# EAGLE board ultrasonic_v3 (EAGLE 9.7.0)
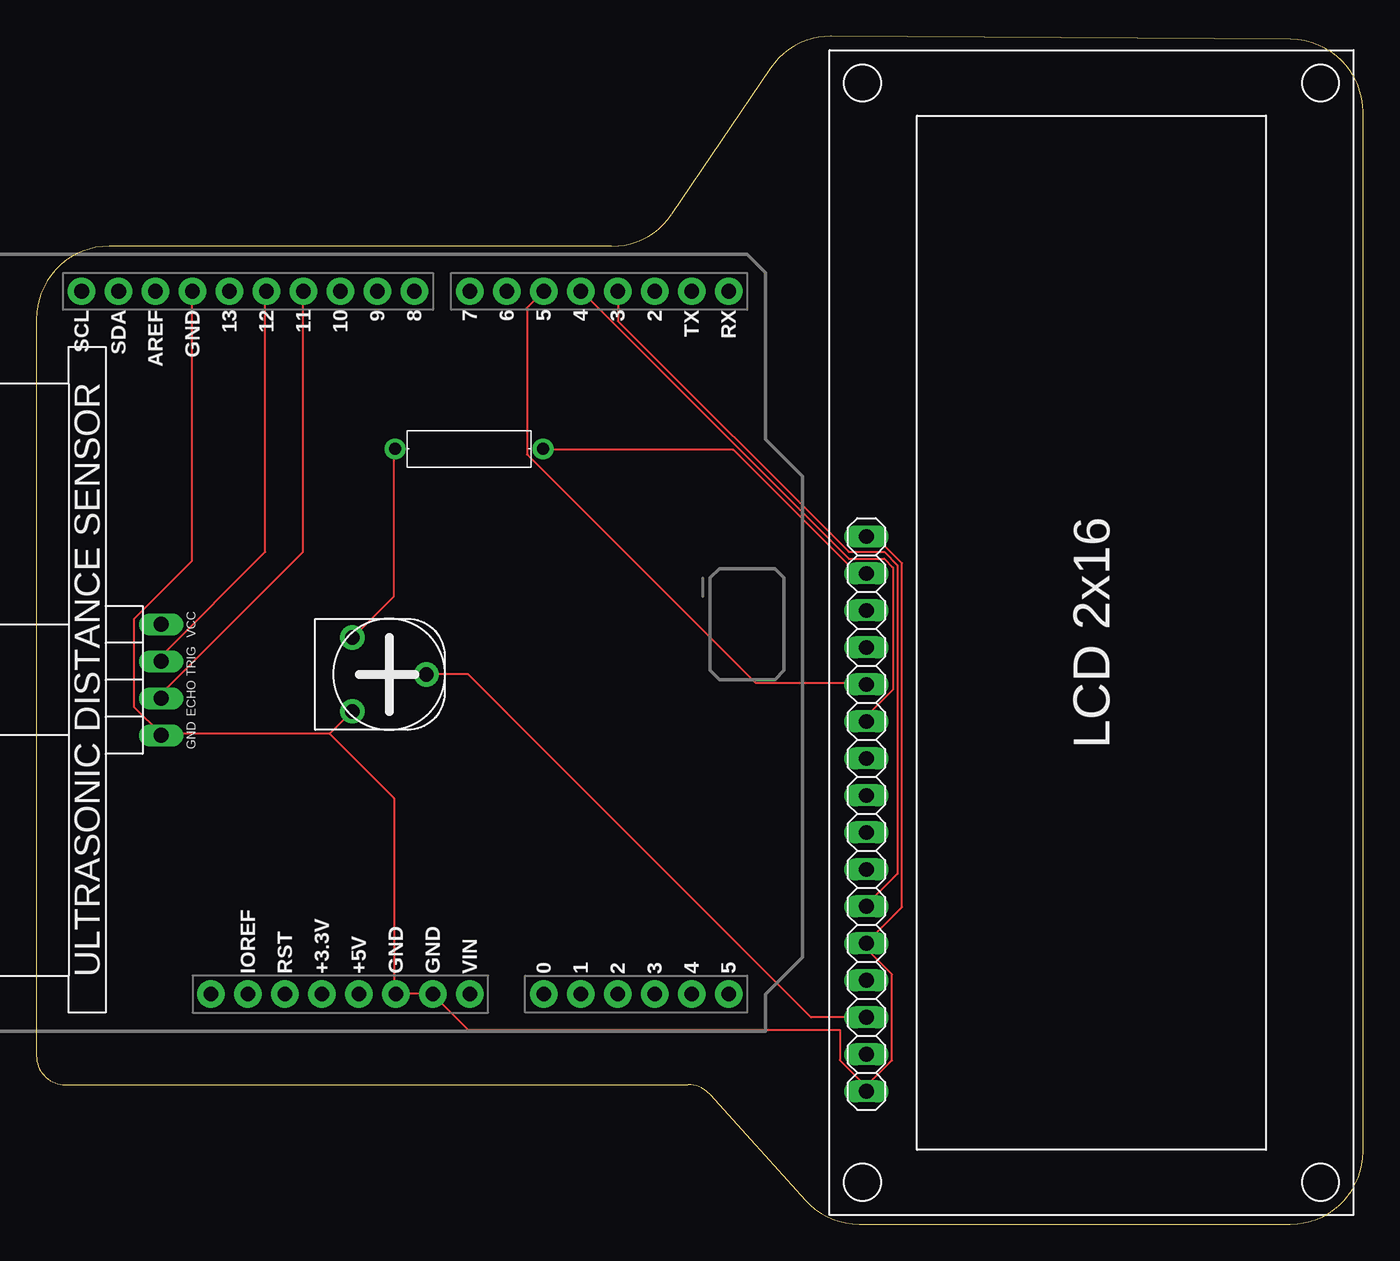
[diagram p0: board, top side]
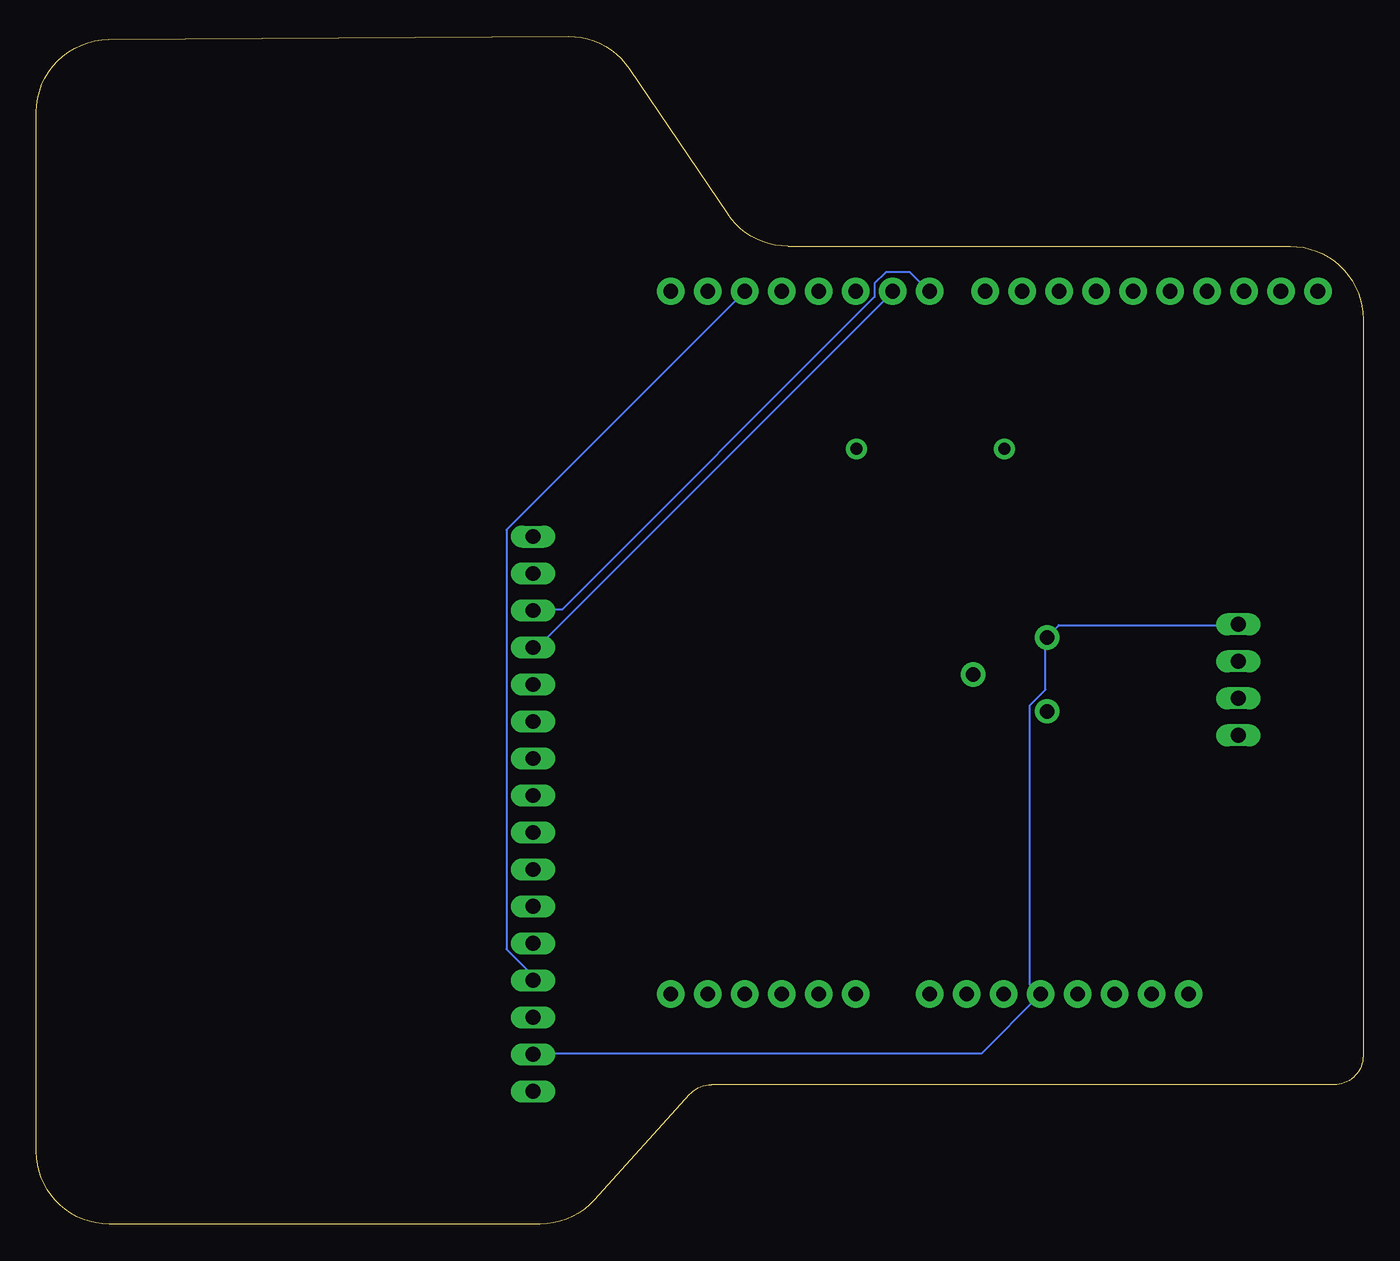
[diagram p1: board, bottom side, seen from below]

Size 91.14 x 81.57 mm. Coordinates in mm from the lower left corner, seen from the top.
Outline: 52.82,1.65 arc48 56.53,0 86.14,0 arc90 91.14,5 91.14,76.36 arc90 86.17,81.36 54.6,81.57 arc56 50.43,79.37 43.65,69.35 arc-56 39.5,67.16 5,67.16 arc90 0,62.16 0,17.34 arc0 0,17.34 0,11.57 arc90 2,9.57 44.78,9.57 arc-48 46.26,8.91 52.82,1.65
Copper layers (1*16): Top 0.035mm / dielectric 1.5mm / Bottom 0.035mm
Design rules "default": minimum track width 6mil, minimum drill 0.35mm, track to track 6mil, track to pad 6mil, pad to pad 6mil, via to via 6mil, smd to smd 6mil, copper to edge 40mil, drill to drill 6mil, minimum pad ring 10mil, minimum via ring 8mil, stop-mask expansion 4mil, vias tented up to drill 0mil, thermal gap 10mil

## Footprints (pad centres in the part's own frame; a part is rotated, then mirrored left to right if it is on the bottom)
HC-SR04 = drill 1.016 long: 1 -3.81,0; 2 -1.27,0; 3 1.27,0; 4 3.81,0
RESAD1016W63L850D250B = drill 0.83 pad 1.43: 1 -5.08,0; 2 5.08,0
HA-06-SM065 = drill 1 pad 1.676: 1 -2.54,-2.54; 2 0,2.54; 3 2.54,-2.54
ARDUINO-UNO-R3-SHIELD = drill 1.016 pad 1.88: 3.3V 24.13,-2.54; 5V 24.13,0; A0 24.13,12.7; A1 24.13,15.24; A2 24.13,17.78; A3 24.13,20.32; A4 24.13,22.86; A5 24.13,25.4; AREF -24.13,-13.97; D2 -24.13,20.32; D3 -24.13,17.78; D4 -24.13,15.24; D5 -24.13,12.7; D6 -24.13,10.16; D7 -24.13,7.62; D8 -24.13,3.81; D9 -24.13,1.27; D10 -24.13,-1.27; D11 -24.13,-3.81; D12 -24.13,-6.35; D13 -24.13,-8.89; GND@0 24.13,2.54; GND@1 24.13,5.08; GND@2 -24.13,-11.43; IOREF 24.13,-7.62; NC 24.13,-10.16; RES 24.13,-5.08; RX -24.13,25.4; SCL -24.13,-19.05; SDA -24.13,-16.51; TX -24.13,22.86; VIN 24.13,7.62
JHD-162A = drill 1.016 long: 1 -19.05,0; 2 -16.51,0; 3 -13.97,0; 4 -11.43,0; 5 -8.89,0; 6 -6.35,0; 7 -3.81,0; 8 -1.27,0; 9 1.27,0; 10 3.81,0; 11 6.35,0; 12 8.89,0; 13 11.43,0; 14 13.97,0; 15 16.51,0; 16 19.05,0

## Placement (x,y rotation side)
DIST1  DISTANCE-SENSOR-4PINHC-SR04  [HC-SR04]  8.57,37.38 270 top
R2  220  [RESAD1016W63L850D250B]  29.71,53.24 0 top
RPOT2  250k  [HA-06-SM065]  24.24,37.76 270 top
U3  ARDUINO-UNO-R3-SHIELD  [ARDUINO-UNO-R3-SHIELD]  22.16,39.93 270 top
U4  LCD-16X2JHD-162A  [JHD-162A]  57.02,28.17 90 top

## Library data of the parts
DIST1 R2 RPOT2 U3 U4 = Tinkercad

## Nets
U3_5V: DIST1.1 R2.1 RPOT2.1 U3.5V U4.2
U3_D2: U3.D2 U4.4
U3_D3: U3.D3 U4.6
U3_D4: U3.D4 U4.11
U3_D5: U3.D5 U4.12
U3_D6: U3.D6 U4.13
U3_D7: U3.D7 U4.14
U3_D11: DIST1.3 U3.D11
U3_D12: DIST1.2 U3.D12
U3_GND: DIST1.4 RPOT2.3 U3.GND@0 U3.GND@1 U3.GND@2 U4.1 U4.5 U4.16
U4_LED+: R2.2 U4.15
U4_VO: RPOT2.2 U4.3

## Tracks (layer width: path | path; a pad name or v marks a point on that pad's centre or on a via)
U3_5V
  Top 0.152: R2.1 24.56,53.17 24.56,43.11 21.82,40.37 RPOT2.1
  Bottom 0.152: DIST1.1 8.71,41.13 20.9,41.13 21.67,40.37 RPOT2.1 21.82,40.22 21.82,36.71 22.89,35.65 22.89,16.44 22.28,15.83 U3.5V 22.28,15.68 26.24,11.72 57.02,11.72 U4.2
U3_D2
  Bottom 0.152: U4.4 57.02,17.05 58.85,18.88 58.85,47.68 42.55,63.99 U3.D2
U3_D3
  Top 0.152: U4.6 57.02,21.93 59.16,24.06 59.16,45.25 58.24,46.16 55.8,46.16 39.95,62.01 39.95,63.99 U3.D3
U3_D4
  Top 0.152: U4.11 57.02,34.88 58.85,36.71 58.85,45.09 58.24,45.7 55.8,45.7 37.52,63.99 U3.D4
U3_D5
  Top 0.152: U4.12 57.02,37.17 49.4,37.17 33.71,52.87 33.71,62.92 34.77,63.99 U3.D5
U3_D6
  Bottom 0.152: U4.13 56.72,39.61 32.33,63.99 U3.D6
U3_D7
  Bottom 0.152: U4.14 57.02,42.2 55.04,42.2 33.55,63.69 33.55,64.6 32.79,65.36 31.12,65.36 29.9,64.14 U3.D7
U3_D11
  Top 0.152: DIST1.3 8.71,36.25 8.71,36.56 18.31,46.16 18.31,63.99 U3.D11
U3_D12
  Top 0.152: DIST1.2 8.71,38.69 8.71,39.15 15.72,46.16 15.72,63.99 U3.D12
U3_GND
  Top 0.152: U4.16 57.02,47.08 57.79,47.08 59.46,45.4 59.46,21.78 57.02,19.34 U4.5 57.02,18.91 58.78,17.15 58.78,11.25 57.02,9.5 U4.1 57.02,9.43 55.19,11.26 55.19,13.34 29.64,13.34 27.31,15.68 U3.GND@1 27.15,15.83 24.71,15.83 U3.GND@0 24.56,15.83 24.56,29.24 20.14,33.66 | 20.14,33.66 8.71,33.66 DIST1.4 8.56,33.66 6.73,35.49 6.73,41.59 10.69,45.55 10.69,63.99 U3.GND@2 | 20.14,33.66 21.67,35.19 RPOT2.3
U4_LED+
  Top 0.152: R2.2 34.93,53.17 47.88,53.17 56.26,44.79 57.02,44.79 U4.15
U4_VO
  Top 0.152: U4.3 53.21,14.2 29.66,37.76 RPOT2.2